# Altium PCB Altium_T3100_gamepad_2025-01-19.pcbdoc
Units mil, origin at the board's own origin, x right, y up, seen from the top; angles counter-clockwise.
Board outline 5750 x 3866.75 mil, 2 copper layers (Top Layer, Bottom Layer); 108 components, 76 nets, 400 pads, 126 vias.
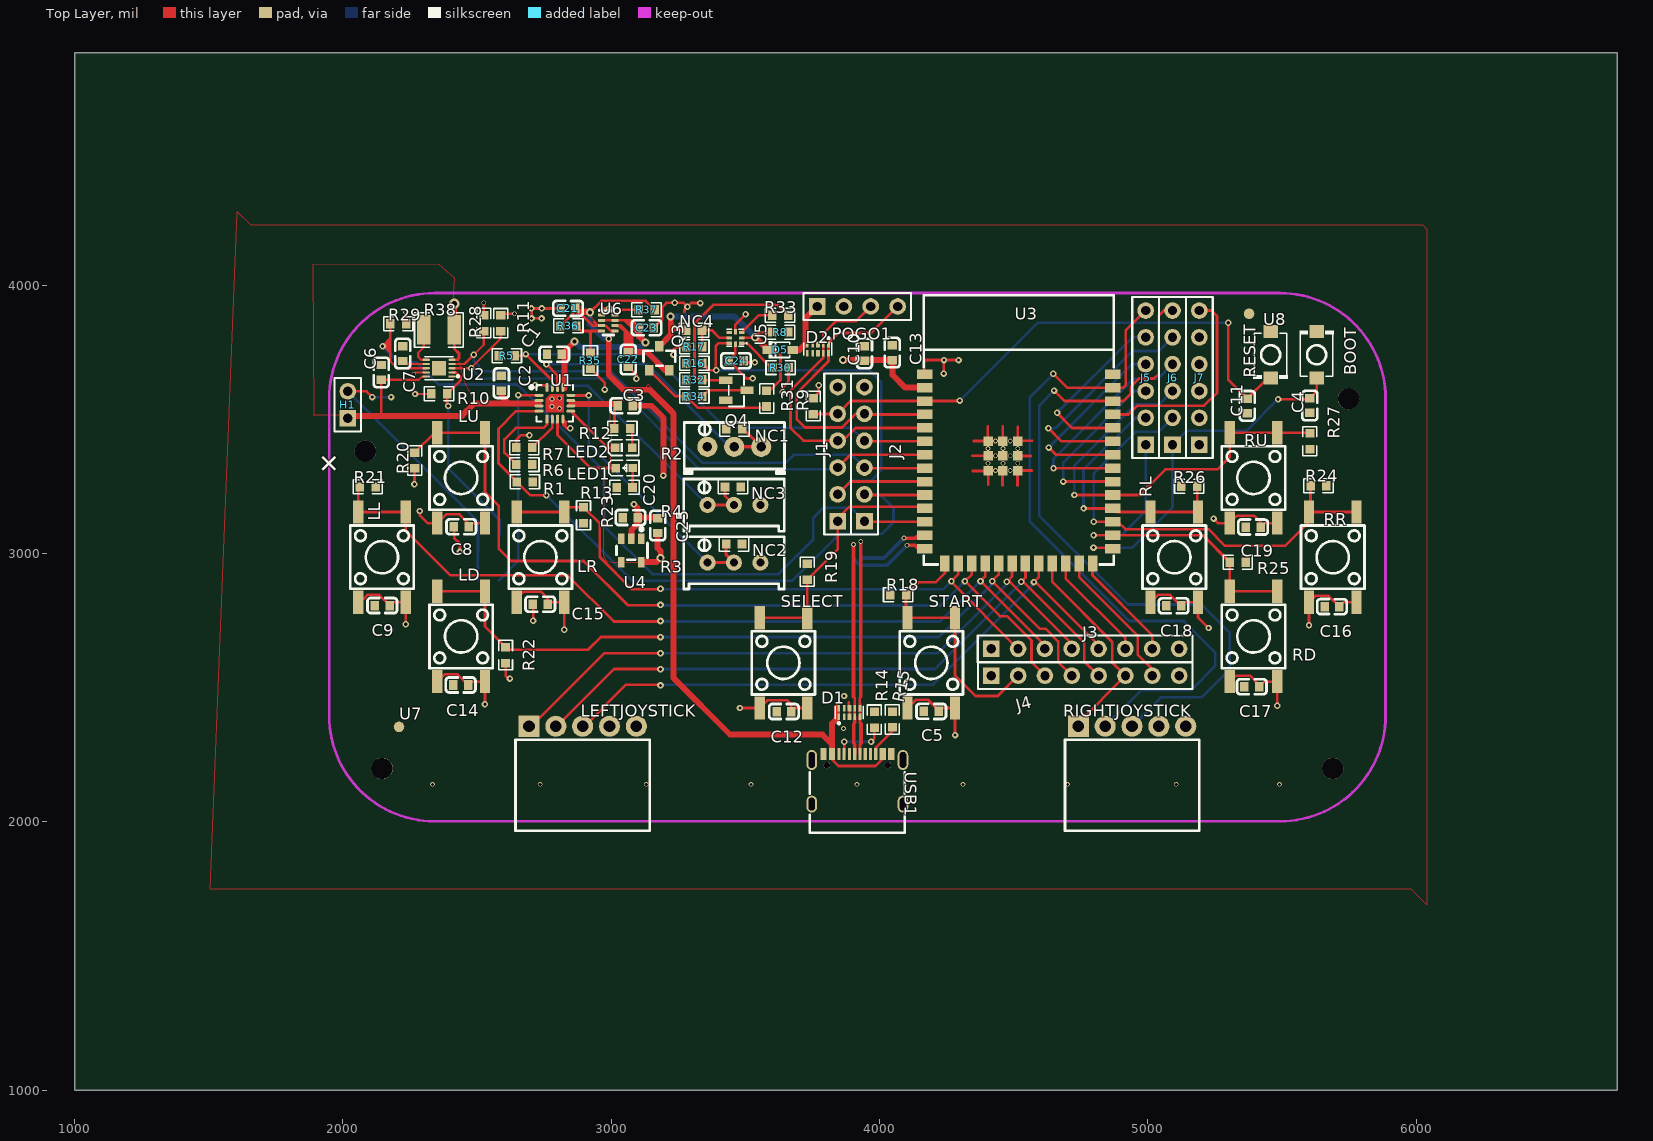
[diagram p0: Top Layer view]
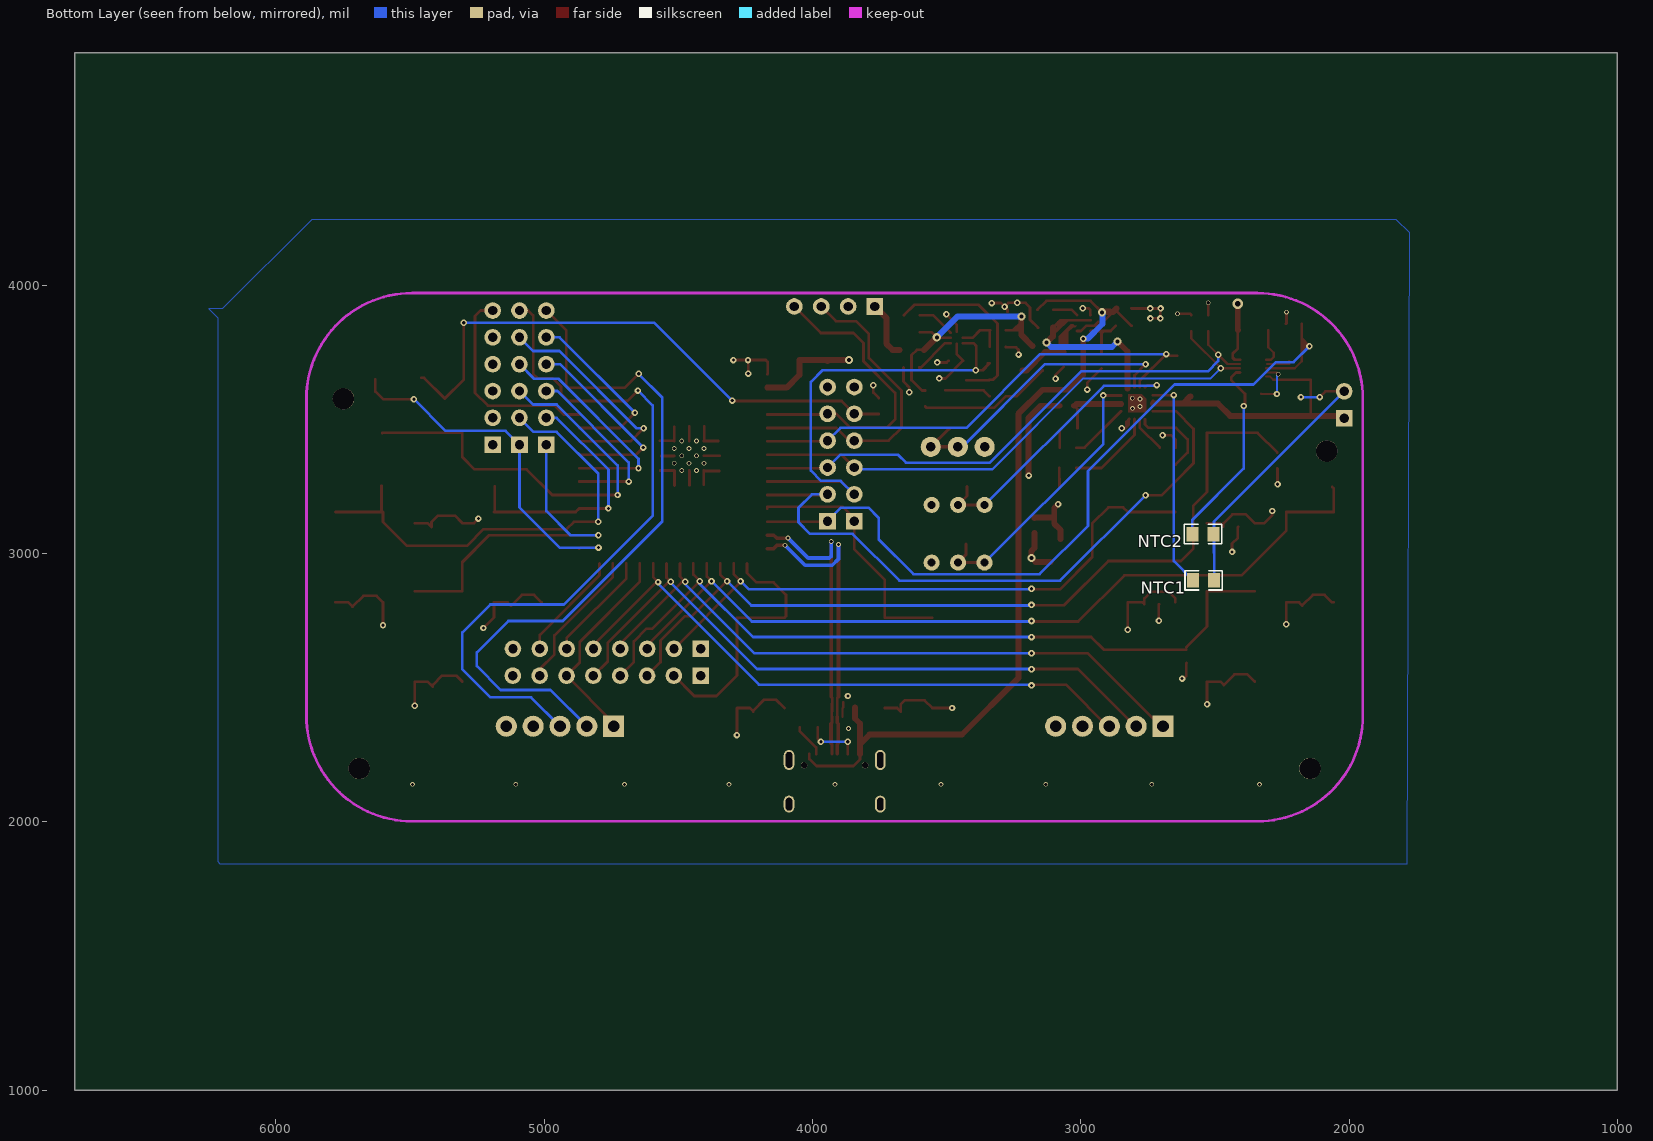
[diagram p1: Bottom Layer view, seen from below]

## Layer stack, top to bottom
Top Layer: signal copper (thickness not stored)
Dielectric: dielectric 12.6, FR-4, Dk 4.8
Bottom Layer: signal copper (thickness not stored)

## Board outline
6750,1000 1000,1000 1000,4866.75 6750,4866.75

## Components (designator, comment, footprint, x,y, rotation, side; value= is the part's Value field where it differs from the comment)
BOOT "TS-1088-AR02016" SW-SMD_L3.9-W3.0-P4.45 5628.75,3740.25 r90 top
C1 "1uF" C0603 2788.25,3742.25 r0 top
C2 "22pF" C0603 2590.75,3634.25 r270 top
C3 "22pF" C0603 3052.5,3550.25 r0 top
C4 "100nF" C0603 5603.75,3551.25 r90 top
C5 "100nF" C0603 4192.75,2411.25 r0 top
C6 "100nF" C0603 2143.25,3674.75 r90 top
C7 "470nF" C0603 2223,3744.75 r270 top
C8 "100nF" C0603 2441.25,3099.25 r0 top
C9 "100nF" C0603 2147.25,2805.75 r0 top
C10 "100nF" C0603 3943.75,3745.25 r270 top
C11 "1uF" C0603 5370.25,3549.75 r270 top
C12 "100nF" C0603 3643.75,2410.75 r0 top
C13 "22pF" C0603 4047,3748 r270 top
C14 "100nF" C0603 2439.25,2509.75 r0 top
C15 "100nF" C0603 2735.75,2810.75 r0 top
C16 "100nF" C0603 5686.25,2801.75 r0 top
C17 "100nF" C0603 5387.25,2503.25 r0 top
C18 "100nF" C0603 5096.25,2804.75 r0 top
C19 "100nF" C0603 5392.25,3098.25 r0 top
C20 "1uF" C0603 3071.25,3133.75 r180 top
C21 "1uF" C0603 2838.75,3913.25 r180 top
C22 "1uF" C0603 3063.75,3722.75 r90 top
C23 "100nF" C0603 3131.75,3841.25 r180 top
C24 "100nF" C0603 3465.75,3718.25 r0 top
C25 "1uF" C0603 3173.25,3103.75 r270 top
D1 "TPD4E05U06DQAR_C138714" USON-10_L2.5-W1.0-P0.50-BL 3887.72,2407.46 r0 top
D2 "TPD4E05U06DQAR_C138714" USON-10_L2.5-W1.0-P0.50-BL 3770.25,3762.25 r180 top
D5 "BAT760-7" SOD-323_L1.8-W1.3-LS2.5-RD 3629.75,3758.75 r0 top
H1 "HDR-F-2.54_1x2" HDR-F-2.54_1X2 2018.75,3554 r90 top
J1 "HDR-M-2.54_1x6" HDR-M-2.54_1X6 3843.75,3370.25 r90 top
J2 "HDR-M-2.54_1x6" HDR-M-2.54_1X6 3943.75,3370.25 r90 top
J3 "HDR-M-2.54_1x8" HDR-M-2.54_1X8 4816,2644.5 r0 top
J4 "HDR-M-2.54_1x8" HDR-M-2.54_1X8 4816.5,2544.51 r0 top
J5 "HDR-M-2.54_1x6" HDR-M-2.54_1X6 4991.75,3655.29 r90 top
J6 "HDR-M-2.54_1x6" HDR-M-2.54_1X6 5091.74,3655.29 r90 top
J7 "HDR-M-2.54_1x6" HDR-M-2.54_1X6 5191.74,3655.29 r90 top
LD "K2-1102SP-C4SC-04" KEY-SMD_4P-L6.0-W6.0-P4.50-LS9.5-BL 2440.88,2690.72 r0 top
LED1 "RED" LED0603-RD_RED 3048.75,3318.25 r0 top
LED2 "GREEN" LED0603-RD_GREEN 3047.25,3394.25 r0 top
LEFTJOYSTICK "2.54mm 1*5TW bend Female header RHOS Bagged" HDR-TH_5P-P2.54-H-W8.5 2893.63,2356.08 r0 top
LL "K2-1102SP-C4SC-04" KEY-SMD_4P-L6.0-W6.0-P4.50-LS9.5-BL 2145.6,2986 r0 top
LR "K2-1102SP-C4SC-04" KEY-SMD_4P-L6.0-W6.0-P4.50-LS9.5-BL 2736.15,2986 r0 top
LU "K2-1102SP-C4SC-04" KEY-SMD_4P-L6.0-W6.0-P4.50-LS9.5-BL 2440.88,3281.28 r0 top
NC1 "0Ω" R0603 3459.25,3463.25 r0 top
NC2 "0Ω" R0603 3457.75,3034.75 r180 top
NC3 "0Ω" R0603 3453.75,3248.25 r180 top
NC4 "0Ω" R0603 3308.75,3831.75 r180 top
NTC1 "10K" R0805 2542.25,2899.75 r0 bottom
NTC2 "10K" R0805 2544.5,3072.25 r0 bottom
POGO1 "HDR-M-2.54_1x4" HDR-M-2.54_1X4 3917.25,3920.25 r0 top
Q3 "AO3401A" SOT-23_L2.9-W1.3-P1.90-LS2.4-BR 3179.75,3727.25 r270 top
Q4 "PMV45EN2R" SOT-23-3_L2.9-W1.3-P1.90-LS2.4-BR 3466.25,3607.75 r180 top
R1 "10kΩ" R0603 2678.25,3266.75 r180 top
R2 "100kΩ" RES-ADJ-TH_3P-L9.5-W4.9-P2.50-L_3296W 3458.75,3397.25 r0 top
R3 "10kΩ" RES-ADJ-TH_3P-L10.0-W10.0-P2.50-L 3457.25,2965.75 r0 top
R4 "10kΩ" RES-ADJ-TH_3P-L10.0-W10.0-P2.50-L 3457.25,3180.75 r0 top
R5 "10kΩ" R0603 2611.25,3736.75 r0 top
R6 "10kΩ" R0603 2676.25,3331.25 r180 top
R7 "10kΩ" R0603 2675.75,3394.25 r0 top
R8 "10kΩ" R0603 3629.75,3824.75 r180 top
R9 "10kΩ" R0603 3752.75,3549.25 r90 top
R10 "10kΩ" R0603 2358.5,3595 r180 top
R11 "4.7kΩ" R0603 2588.25,3858.25 r90 top
R12 "56Ω" R0603 3041.75,3466.25 r180 top
R13 "56Ω" R0603 3049.75,3246.25 r180 top
R14 "5.1kΩ" R0603 3980.75,2380.75 r270 top
R15 "5.1kΩ" R0603 4047.75,2381.25 r270 top
R16 "10kΩ" R0603 3309.75,3708.75 r0 top
R17 "10kΩ" R0603 3309.75,3770.25 r0 top
R18 "10kΩ" R0603 4069.25,2845.75 r0 top
R19 "10kΩ" R0603 3730.75,2931.75 r270 top
R20 "10kΩ" R0603 2267.75,3346.25 r90 top
R21 "10kΩ" R0603 2092.75,3248.25 r180 top
R22 "10kΩ" R0603 2606.25,2621.25 r90 top
R23 "10kΩ" R0603 2896.75,3142.25 r90 top
R24 "10kΩ" R0603 5635.75,3252.25 r180 top
R25 "10kΩ" R0603 5334.75,2967.25 r180 top
R26 "10kΩ" R0603 5153.75,3250.25 r0 top
R27 "10kΩ" R0603 5603.75,3418.25 r90 top
R28 "4.7kΩ" R0603 2525,3858.5 r90 top
R29 "4.7kΩ" R0603 2206.25,3855.75 r0 top
R30 "10kΩ" R0603 3631.25,3692.75 r0 top
R31 "10kΩ" R0603 3579.25,3577.25 r90 top
R32 "10kΩ" R0603 3309.75,3647.25 r0 top
R33 "75Ω" R0603 3629.25,3887.75 r0 top
R34 "75Ω" R0603 3309.75,3585.25 r180 top
R35 "10kΩ" R0603 2922.75,3718.75 r270 top
R36 "36kΩ" R0603 2840.25,3848.25 r0 top
R37 "10kΩ" R0603 3131.75,3908.25 r180 top
R38 "10mΩ" R1210 2358,3833 r180 top
RD "K2-1102SP-C4SC-04" KEY-SMD_4P-L6.0-W6.0-P4.50-LS9.5-BL 5393.62,2690.72 r0 top
RESET "TS-1088-AR02016" SW-SMD_L3.9-W3.0-P4.45 5457.25,3740.25 r270 top
RIGHTJOYSTICK "2.54mm 1*5TW bend Female header RHOS Bagged" HDR-TH_5P-P2.54-H-W8.5 4940.87,2356.08 r0 top
RL "K2-1102SP-C4SC-04" KEY-SMD_4P-L6.0-W6.0-P4.50-LS9.5-BL 5098.35,2986 r0 top
RR "K2-1102SP-C4SC-04" KEY-SMD_4P-L6.0-W6.0-P4.50-LS9.5-BL 5688.9,2986 r0 top
RU "K2-1102SP-C4SC-04" KEY-SMD_4P-L6.0-W6.0-P4.50-LS9.5-BL 5393.62,3281.28 r0 top
SELECT "K2-1102SP-C4SC-04" KEY-SMD_4P-L6.0-W6.0-P4.50-LS9.5-BL 3641.66,2592.3 r0 top
START "K2-1102SP-C4SC-04" KEY-SMD_4P-L6.0-W6.0-P4.50-LS9.5-BL 4192.84,2592.3 r0 top
U1 "BQ24075RGTR" QFN-16_L3.0-W3.0-P0.50-TL-EP1.7 2790.25,3559.75 r0 top
U2 "MAX17055ETB+" TDFN-10_L2.5-W2.0-P0.40-BL-EP 2358.5,3690.25 r90 top
U3 "ESP32-S3-WROOM-1-N4" WIFIM-SMD_ESP32-S3-WROOM-1-N8 4518.75,3315.25 r0 top
U4 "TPAP2112K-3.3TRG1" SOT-23-5_L2.9-W1.6-P0.95-LS2.8-BR 3075,3011.25 r90 top
U5 "NC7SZ74L8X" UFQFN-8_L1.6-W1.6-P0.50-TL 3462.75,3803.25 r180 top
U6 "TPS2116DRLR" SOT-583-8_L2.1-W1.6-P0.50-LS1.6-BL 2989.25,3858.75 r270 top
U7 "FIDUCIAL 1MM" "FIDUCIAL 1MM" 2209.25,2353.5 r0 top
U8 "FIDUCIAL 1MM" "FIDUCIAL 1MM" 5377,3893.25 r0 top
USB1 "GT-USB-7010C" USB-C-SMD_GT-USB-7010C 3917.25,2159.23 r0 top

## Footprints (in the part's own frame and the unit in brackets; to place one, negate y for a bottom-side part, rotate by r counter-clockwise, add the part's x,y. Pads: shape width x height; smd on the part's side, far side on the other; paste and mask are expansions set on the pad)
C0603 [mm]
  rect 0.8x0.9 smd paste+0 mask+0.051: 1(-0.7,0) 2(0.7,0)
  silkscreen extent -1.41,-0.71 1.39,0.72
"FIDUCIAL 1MM" [mm]
  round 1 smd paste+0 mask+0.5: 1(0,0)
HDR-F-2.54_1X2 [mil]
  rect 62x62 hole 35 paste+0 mask+2: 1(-50,0)
  round 62 hole 35 paste+0 mask+2: 2(50,0)
  silkscreen extent -100,-49 100,50
HDR-M-2.54_1X4 [mil]
  rect 62x62 hole 35 paste+0 mask+2: 1(-150,0)
  round 62 hole 35 paste+0 mask+2: 2(-50,0) 3(50,0) 4(150,0)
  silkscreen extent -200,-50 200,50
HDR-M-2.54_1X6 [mil]
  rect 62x62 hole 35 paste+0 mask+2: 1(-250,0)
  round 62 hole 35 paste+0 mask+2: 2(-150,0) 3(-50,0) 4(50,0) 5(150,0) 6(250,0)
  silkscreen extent -300,-50 300,50
HDR-M-2.54_1X8 [mil]
  rect 62x62 hole 35 paste+0 mask+2: 1(-400,0)
  round 62 hole 35 paste+0 mask+2: 2(-300,0) 3(-200,0) 4(-100,0) 5(0,0) 6(100,0) 7(200,0) 8(300,0)
  silkscreen extent -450,-50 350,50
HDR-TH_5P-P2.54-H-W8.5 [mm]
  rect 2x2 hole 1.1 paste+0 mask+0.051: 1(-5.08,0)
  round 2 hole 1.1 paste+0 mask+0.051: 2(-2.54,0) 3(0,0) 4(2.54,0) 5(5.08,0)
  silkscreen extent -6.35,-9.91 6.35,-1.27
KEY-SMD_4P-L6.0-W6.0-P4.50-LS9.5-BL [mm]
  rect 0.98x2.2 smd paste+0 mask+0.051: 1(-2.25,-4.275) 2(-2.25,4.275) 3(2.25,-4.275) 4(2.25,4.275)
  silkscreen extent -3,-3 3,3
LED0603-RD_GREEN [mm]
  rect 0.8x0.8 smd paste+0 mask+0.051: 1(-0.799,-0.003) 2(0.799,0.004)
  silkscreen extent -1.49,-0.75 1.39,0.76
LED0603-RD_RED [mm]
  rect 0.8x0.8 smd paste+0 mask+0.051: 1(-0.799,-0.003) 2(0.799,0.004)
  silkscreen extent -1.49,-0.75 1.39,0.76
QFN-16_L3.0-W3.0-P0.50-TL-EP1.7 [mm]
  oval 0.85x0.28 smd paste-100 mask+0.05: 1(-1.5,0.75) 2(-1.5,0.25) 3(-1.5,-0.25) 4(-1.5,-0.75) 9(1.5,-0.75) 10(1.5,-0.25) 11(1.5,0.25) 12(1.5,0.75)
  oval 0.28x0.85 smd paste-100 mask+0.05: 5(-0.75,-1.5) 6(-0.25,-1.5) 7(0.25,-1.5) 8(0.75,-1.5) 13(0.75,1.5) 14(0.25,1.5) 15(-0.25,1.5) 16(-0.75,1.5)
  Top Layer region: 0.85,0.85 0.85,-0.85 -0.85,-0.85 -0.85,0.425 -0.425,0.85
  silkscreen extent -2.38,-1.72 1.72,1.73
R0603 [mil]
  rect 31.75x34.02 smd paste-3937.01 mask+2: 1(-29.66,0) 2(29.66,0)
  silkscreen extent -55,-26 55,26
R0805 [mil]
  rect 44.59x54.21 smd paste-3937.01 mask+2: 1(39.37,0) 2(-39.37,0)
  silkscreen extent -69,-36 69,36
R1210 [mil]
  rect 50.49x110.55 smd paste-3937.01 mask+2: 1(-56.74,0) 2(56.74,0)
  silkscreen extent -91,-64 91,64
RES-ADJ-TH_3P-L9.5-W4.9-P2.50-L_3296W [mm]
  round 1.9 hole 0.9 paste+0 mask+0.051: 1(-2.55,0) 2(-0.01,0) 3(2.55,0)
  silkscreen extent -4.75,-2.54 4.75,2.3
RES-ADJ-TH_3P-L10.0-W10.0-P2.50-L [mil]
  round 60 hole 30 paste+0 mask+2: 1(-98.43,0) 2(0,0) 3(98.43,0)
  silkscreen extent -187,-98 187,96
SOD-323_L1.8-W1.3-LS2.5-RD [mm]
  rect 1x0.75 smd paste+0 mask+0.051: 1(-1.173,0) 2(1.173,0)
  silkscreen extent -1.08,-0.8 0.9,0.8
SOT-23-3_L2.9-W1.3-P1.90-LS2.4-BR [mm]
  rect 1.25x0.7 smd paste+0 mask+0.051: 1(1,-0.95) 2(1,0.95) 3(-1,0)
  silkscreen extent -0.73,-1.53 0.73,1.53
SOT-23-5_L2.9-W1.6-P0.95-LS2.8-BR [mm]
  rect 1x0.6 smd paste+0 mask+0.05: 1(1.1,-0.95) 2(1.1,0) 3(1.1,0.95) 4(-1.1,0.95) 5(-1.1,-0.95)
  silkscreen extent -0.89,-1.52 2.16,1.4
SOT-23_L2.9-W1.3-P1.90-LS2.4-BR [mm]
  rect 1x0.8 smd paste+0 mask+0.051: 1(1.15,-0.95) 2(1.15,0.95) 3(-1.15,0)
  silkscreen extent -0.7,-1.5 0.7,1.5
SOT-583-8_L2.1-W1.6-P0.50-LS1.6-BL [mm]
  rect 0.28x0.68 smd paste+0 mask+0.051: 1(-0.75,-0.64) 2(-0.25,-0.64) 3(0.25,-0.64) 4(0.75,-0.64) 5(0.75,0.64) 6(0.25,0.64) 7(-0.25,0.64) 8(-0.75,0.64)
  silkscreen extent -1.27,-0.92 1.14,0.51
SW-SMD_L3.9-W3.0-P4.45 [mm]
  rect 1.23x1.36 smd paste+0 mask+0.051: 1(-2.185,0) 2(2.185,0)
  silkscreen extent -2.03,-1.62 2.25,1.62
TDFN-10_L2.5-W2.0-P0.40-BL-EP [mm]
  oval 0.2x0.685 smd paste+0 mask+0.051: 1(-0.8,-1.218) 2(-0.4,-1.218) 3(0,-1.218) 4(0.4,-1.218) 5(0.8,-1.218) 6(0.8,1.217) 7(0.4,1.217) 8(0,1.217) 9(-0.4,1.217) 10(-0.8,1.217)
  rect 1.4x1.3 smd paste-0.05 mask+0.051: 11(0,0)
  silkscreen extent -1.08,-1.88 1.08,1.33
UFQFN-8_L1.6-W1.6-P0.50-TL [mm]
  rect 0.53x0.3 smd paste+0 mask+0.051: 1(-0.585,0.5) 2(-0.585,0) 3(-0.585,-0.5) 5(0.585,-0.5) 6(0.585,0) 7(0.585,0.5)
  rect 0.3x0.53 smd paste+0 mask+0.051: 4(0,-0.585) 8(0,0.585)
  silkscreen extent -1.14,-0.8 0.8,0.8
USB-C-SMD_GT-USB-7010C [mm]
  oval 1x1.9 hole 0.6 slot 1.5 at 90 deg paste+0 mask+0.05: 1(-4.32,1.807) 2(4.32,1.807)
  oval 1x1.6 hole 0.6 slot 1.2 at 90 deg paste+0 mask+0.05: 3(4.32,-2.373) 4(-4.32,-2.373)
  rect 0.6x1.15 smd paste-100 mask+0.05: A1B12(-3.2,2.372) A4B9(-2.4,2.372) B1A12(3.2,2.373) B4A9(2.4,2.372)
  rect 0.3x1.15 smd paste-100 mask+0.05: A5(-1.25,2.372) A6(-0.25,2.372) A7(0.25,2.372) A8(1.25,2.372) B5(1.75,2.372) B6(0.75,2.372) B7(-0.75,2.372) B8(-1.75,2.372)
  round 0.6 hole 0.6 unplated paste+0: ""(-2.89,1.308) ""(2.89,1.308)
  silkscreen extent -4.5,-5.07 4.5,0.65
USON-10_L2.5-W1.0-P0.50-BL [mm]
  rect 0.25x0.609 smd paste+0 mask+0.051: 1(-1,-0.415) 2(-0.5,-0.415) 4(0.5,-0.415) 5(1,-0.415) 6(1,0.415) 7(0.5,0.415) 9(-0.5,0.415) 10(-1,0.415)
  rect 0.38x0.609 smd paste+0 mask+0.051: 3(0,-0.415) 8(0,0.414)
  silkscreen extent -1.33,-1.12 1.33,0.58
WIFIM-SMD_ESP32-S3-WROOM-1-N8 [mm]
  rect 1.5x0.9 smd paste+0 mask+0.05: 1(-8.9,8.955) 2(-8.9,7.685) 3(-8.9,6.415) 4(-8.9,5.145) 5(-8.9,3.875) 6(-8.9,2.605) 7(-8.9,1.335) 8(-8.9,0.065) 9(-8.9,-1.205) 10(-8.9,-2.475) 11(-8.9,-3.745) 12(-8.9,-5.015) 13(-8.9,-6.285) 14(-8.9,-7.555) 27(8.9,-7.555) 28(8.9,-6.285) 29(8.9,-5.015) 30(8.9,-3.745) 31(8.9,-2.475) 32(8.9,-1.205) 33(8.9,0.065) 34(8.9,1.335) 35(8.9,2.605) 36(8.9,3.875) 37(8.9,5.145) 38(8.9,6.415) 39(8.9,7.685) 40(8.9,8.955)
  rect 0.9x1.5 smd paste+0 mask+0.05: 15(-6.985,-8.955) 16(-5.715,-8.955) 17(-4.445,-8.955) 18(-3.175,-8.955) 19(-1.905,-8.955) 20(-0.635,-8.955) 21(0.635,-8.955) 22(1.905,-8.955) 23(3.175,-8.955) 24(4.445,-8.955) 25(5.715,-8.955) 26(6.985,-8.955)
  rect 0.9x0.9 smd paste+0 mask+0.051: 41(-2.9,-0.165) 41(-2.9,1.235) 41(-2.9,2.635) 41(-1.5,-0.165) 41(-1.5,1.235) 41(-1.5,2.635) 41(-0.1,-0.165) 41(-0.1,1.235) 41(-0.1,2.635)
  silkscreen extent -9,-9.05 9,16.45

## Free pads (board coordinates)
  round 80 hole 80 unplated paste+0: ""(2083.75,3381.25) ""(2145.6,2198.6) ""(5688.9,2198.6) ""(5747.96,3576.55)

## Via types
v1: diameter 24, hole 12, Top Layer to Bottom Layer, tented both sides, 65 vias
v2: diameter 17.72, hole 11.81, Top Layer to Bottom Layer, tented both sides, 34 vias
v3: diameter 24.41, hole 12.2, Top Layer to Bottom Layer, tented both sides, 19 vias
v4: diameter 30, hole 15, Top Layer to Bottom Layer, tented both sides, 7 vias
v5: diameter 40, hole 20, Top Layer to Bottom Layer, tented both sides, 1 vias

## Nets (pads, with @x,y where several pads share a name; then routed paths per layer and width w, separated by ;. In a path a pad name is that pad's centre, name@x,y a point inside that pad or via, vN(x,y) a via of type N, cw(c..) or ccw(c..) an arc to the next point about the centre after c; other vN are vias at no path point)
+3.3V: C5.2 C8.2 C9.2 C10.2 C12.2 C13.2 C15.2 C16.2 C17.2 C18.2 C19.2 C24.1 C25.2 J2.6 J4.1 J4.8 J7.1 J7.5 LEFTJOYSTICK.4 LL.1 LL.3 LR.1 LR.3 LU.1 LU.3 R9.2 R11.2 R28.2 R29.2 R30.2 RD.1 RD.3 RIGHTJOYSTICK.4 RL.1 RL.3 RR.1 RR.3 RU.1 RU.3 SELECT.1 SELECT.3 START.1 START.3 U3.2 U4.5 U5.8 | length 4125
  Top Layer w10: LL.1@2057.05,2817.65 2063.15,2817.65 2091.25,2845.75 2134.85,2845.75 C9.2 ; C9.2 2186.75,2817.69 LL.3 v1(2234.18,2736.25) ; v2(2233.25,3899.25) 2233.25,3858.41 R29.2 ; v1(2286.25,3158.25) 2286.25,3142.75 2316.05,3112.95 LU.1@2352.25,3112.95 ; 2352.25,2522.45 2379.15,2549.25 2427.35,2549.25 2466.85,2509.75 ; LU.1 2385.07,3145.75 2435.25,3145.75 2468.81,3112.19 C8.2 2482.53,3112.97 LU.3 ; 2466.81,2509.75 2479.48,2522.42 2529.46,2522.42 v1(2529.46,2438.25) ; R28.2 2525.25,3888.41 v2(2525.25,3934.25) ; R11.2 2593.59,3893.25 v2(2639.25,3893.25) ; LR.1@2647.55,2817.65 2647.55,2832.25 2672.95,2857.75 2738.25,2857.75 2763.35,2832.65 C15.2@2763.35,2810.75 ; C15.2 2770.25,2817.69 LR.3 v1(2824.73,2715.25) ; U5.8 3462.75,3742.81 C24.1 3504.19,3652.25 v1(3527.75,3652.25) ; v1(3479.75,2423.99) SELECT.1 ; SELECT.1@3553.05,2423.95 3581.85,2452.75 3656.25,2452.75 3671.35,2437.65 C12.2@3671.35,2410.75 ; v1(3639.5,3600.5) 3639.5,3619.25 3645.5,3625.25 3660.91,3640.66 R30.2 ; C12.2 3684.55,2423.99 SELECT.3 ; R9.2@3752.75,3578.91 3773.25,3599.41 v3(3773.25,3627.25) ; START.1@4104.25,2423.99 4135.01,2454.75 4180.25,2454.75 4220.31,2414.69 C5.2 4233.05,2423.99 START.3 v1(4281.42,2323.25) ; RL.1 5037.83,2845.75 5082.81,2845.75 C18.2 5136.75,2817.69 RL.3 5186.93,2761.32 v1(5226,2722.25) ; v1(5244.75,3129.75) 5261.53,3112.97 RU.1 5332.82,3140.75 5396.25,3140.75 5419.81,3117.19 C19.2 5434.53,3112.97 RU.3 ; RD.1 5327.37,2544.75 5379.75,2544.75 5414.81,2509.69 C17.2 5433.98,2522.42 RD.3 v1(5482.21,2432.25) ; v1(5600.32,2732.25) RR.1 5624.88,2842.25 5673.31,2842.25 C16.2 5729.75,2817.69 RR.3
  Top Layer w22: U4.5 3168.94,2967.94 v4(3184.5,2983.5) 3184.5,3008.75 3173.25,3020 C25.2 ; v4(3863.25,3720.75) 3940.69,3720.75 C10.2 3946.94,3720.88 C13.2@4048.75,3720.88 ; C13.2@4048.75,3720.85 4048.75,3665.25 4096.25,3617.75 U3.2
+5V: C1.2 C23.2 U1.13 U6.2 U6.7 | length 686.4
  Top Layer w10: U6.2@2964.05,3868.59 U6.7 ; U6.7 3076.85,3868.55 C23.2
  Top Layer w22: 2826.25,3614.75 2826.25,3752.69 v4(2863.31,3789.75) ; C23.2@3104.19,3841.25 3104.19,3809.06 v4(3127.5,3785.75)
  Bottom Layer w22: v4(2863.31,3789.75) 2883.81,3769.25 3111,3769.25 v4(3127.5,3785.75)
ALLOWPOGOCHARGING: J1.2 R16.2 U3.9 U5.7 | length 1722.6
  Top Layer w10: R16.2 3365.41,3682.75 v1(3391.25,3682.75) 3389.55,3682.75 3389.55,3773.45 3399.55,3783.55 U5.7@3439.75,3783.55 ; R16.2 R16.2@3346.05,3708.75 ; J1.2 3891.29,3267.79 U3.9
  Bottom Layer w10: v1(3391.25,3682.75) 3962.25,3682.75 4006.25,3638.75 4006.25,3308.75 3968.25,3270.75 3894.75,3270.75 J1.2
ALRT_U2: J2.1 R29.1 U2.8 U3.12 | length 3042.4
  Top Layer w7.87: R29.1 2176.55,3715.85 2202.25,3690.25 U2.8
  Top Layer w10: v1(2148.25,3772) 2176.59,3800.34 R29.1 ; J2.1 3946.21,3117.79 U3.12
  Bottom Layer w10: v1(2148.25,3772) 2207.25,3712.95 2273.25,3712.95 2356.95,3629.25 2650.75,3629.25 2973.25,3306.75 2973.25,3102.95 3153.25,2922.95 3623.25,2922.95 3753.25,3052.95 3753.25,3132.95 3790.75,3170.45 3893.55,3170.45 J2.1
BAT+: C2.2 C6.1 H1.1 U1.2 U1.3 U2.10 | length 1185.6
  Top Layer w7.87: C6.1 2282.65,3647.15 2294.25,3658.75 U2.10
  Top Layer w10: 2143.25,3512.75 C6.1 ; U1.3 U1.2
  Top Layer w22: H1.1 2027.55,3512.75 2443.25,3512.75 2489.35,3558.85 2704.95,3558.85 ; 2591.75,3585.38 2618.31,3558.82 2731.2,3558.82
BAT_SAFE+: C3.1 C20.2 R12.2 R13.2 U1.10 U1.11 U4.1 U4.3 | length 446.4
  Top Layer w10: U1.10 2849.65,3550.25 C3.1 ; R12.2@3012.1,3466.25 3012.1,3537.47 C3.1 C3.1 ; C3.1@3022.22,3549.91 3022.56,3550.25 C3.1
  Top Layer w22: 2849.35,3557.05 3015.85,3557.05 3022.65,3550.25 C3.1
BATGND: C6.2 C7.1 H1.2 NTC1.2 NTC2.2 R38.2 U2.6 U2.11 | length 1218
  Top Layer w7.87: R38.2@2301.25,3832.95 2301.25,3768.05 2281.05,3747.75 2281.05,3731.95 2291.25,3721.75 U2.6@2310.55,3721.75
  Top Layer w10: H1.2 2088.25,3604 v1(2109.75,3582.5)
  Bottom Layer w10: H1.2 2503.38,3119.37 NTC2.2@2503.38,3096.75 ; v1(2109.75,3582.5) v1(2179.75,3582.5) ; NTC1.2@2502.85,2899.75 NTC2.2@2503.35,3096.75
C14_2: C14.2
EN: C11.1 J1.5 R9.1 RESET.2 U3.3 | length 2118.9
  Top Layer w10: R9.1 3843.09,3519.59 J1.5 3891.29,3567.79 U3.3 ; U3.3 4299.25,3567.75 v1@4299.25,3569.55 ; v1(5299.25,3859.5) 5299.25,3648.31 C11.1 5447.17,3654.23 RESET.2
  Bottom Layer w10: v1(4299.25,3569.5) 4589.25,3859.5 v1(5299.25,3859.5)
EN1_U1: R7.2 U1.6 | length 137.5
  Top Layer w10: R7.2 2780.41,3469.26 U1.6
EN2_U1: R6.2 U1.5 | length 314.2
  Top Layer w10: R6.2 2601.75,3376.05 2601.75,3424.75 2645.25,3468.25 2748.25,3468.25 2760.75,3480.75 U1.5@2760.75,3500.65
GND: BOOT.2 C1.1 C2.1 C3.2 C4.1 C5.1 C8.1 C9.1 C10.1 C11.2 C12.1 C13.1 C14.1 C15.1 C16.1 C17.1 C18.1 C19.1 C20.1 C21.2 C22.1 C23.1 C24.2 C25.1 D1.3 D1.8 D2.3 D2.8 J1.6 J3.1 J3.8 J7.2 J7.3 J7.4 LEFTJOYSTICK.5 NC1.1 NC2.1 NC3.1 POGO1.2 Q4.2 R1.1 R2.1 R3.3 R4.3 R5.1 R6.1 R7.1 R8.1 R14.1 R15.1 R16.1 R17.1 R18.1 R19.1 R20.1 R21.1 R23.1 R24.1 R25.1 R26.1 R27.1 R32.1 R35.2 R38.1 RESET.1 RIGHTJOYSTICK.5 U1.8 U2.5 U3.1 U3.40 U3.41 U4.2 U5.4 U6.1 USB1.1 USB1.2 USB1.3 USB1.4 USB1.A1B12 USB1.B1A12 | length 3059.4
  Top Layer w7.87: 3885.36,2447.03 3885.36,2426.14 D1.8 D1.3
  Top Layer w10: v1(2266.75,3258.25) 2266.75,3315.59 R20.1 ; U2.5@2406.45,3721.75 2426.25,3721.75 2433.75,3729.25 2433.75,3745.05 2414.75,3764.05 R38.1@2414.75,3832.95 ; C8.1 2415,3097.94 2415,3057.5 2436.25,3036.25 v1(2436.25,3005.5) ; 2606.25,2591.59 2607.25,2590.59 2607.25,2542.5 2616,2533.75 v1(2622.5,2533.75) ; R7.1 2646.75,3423.75 2663.75,3440.75 v1(2695.25,3440.75) ; C15.1 2709,2809.94 v1(2709,2749.25) ; v1(2740.5,3876) v1(2703.5,3876) 2703.5,3912 v1(2702.5,3913) v1(2741.5,3913) 2810.94,3913 C21.2 ; 2830.5,3480.5 2830.5,3489.97 U1.8 2822.5,3497.97 2822.5,3478.5 2834.5,3466.5 v1(2847.5,3466.5) ; R35.2 2976.25,3635.59 v1(2976.25,3610.75) ; U6.1@2964.05,3888.28 2964.5,3888.73 2964.5,3907.5 2970.75,3913.75 v1(2993,3913.75) ; C22.1 3094,3664.94 v1(3094,3651) ; C23.1@3159.31,3841.25 3189,3870.94 3189,3916.75 3206.25,3934 v1(3236.75,3934) 3269.5,3934 v1(3284,3919.5) ; v1(3232,3741) 3232,3759 3241,3768 3277.84,3768 R17.1 ; 3273.25,3901 3273.25,3908.75 v1(3284,3919.5) ; v1(3332,3933) 3297.5,3933 v1(3284,3919.5) ; U5.4 3462.75,3852.75 v1(3501,3891) ; C24.2 3499.81,3711.75 v1(3534.75,3711.75) ; U3.1 4167,3669.15 4167,3713.75 4174,3720.75 v1(4240.25,3720.75) ; v1(4239.5,3670.25) 4239.5,3720 v1(4240.25,3720.75) ; v1(4294.75,3720.75) v1(4240.25,3720.75) ; 4345.75,3364 4404.47,3364 U3.41@4404.6,3363.87 ; 4347.75,3307.5 4403.34,3307.5 4404.6,3308.76 4405.25,3308.11 4405.25,3255.5 ; 4351.25,3419 4404.59,3419 4403.5,3420.09 4403.5,3473 ; 4458.25,3254.5 4458.25,3307.28 U3.41@4459.72,3308.75 ; 4459,3473.25 4459,3419.71 U3.41@4459.72,3418.99 ; 4514.25,3253.5 4514.25,3308.18 4514.83,3308.76 4515.07,3309 4567.25,3309 ; 4514.75,3472.5 4514.75,3419.07 4514.83,3418.99 4515.59,3419.75 4568.5,3419.75 ; U3.41@4514.83,3363.87 4515.7,3363 4563.25,3363
  Top Layer w22: R38.1 2415.25,3833.51 v5(2415.25,3930.75) ; U4.2 3075.05,3087.25 3098.85,3111.05 C20.1 ; C3.2 3150,3550.25 3195,3505.25 3195,3291 v1(3194,3290) ; v1(3084.75,3183.5) 3098.81,3169.44 C20.1 3170.81,3133.75 C25.1
  other v1: 3867.75,2468.75
  other v2: 2334.5,2139.54 2735.75,2139.54 3130.75,2139.54 3520.75,2139.54 3915.75,2139.54 4310.75,2139.54 4700.75,2139.54 5105.75,2139.54 5490.75,2139.54 3865.28,2347.42 4432.15,3308.75 4487.27,3308.75 4404.59,3336.31 4459.71,3336.31 4514.83,3336.31 4432.15,3363.87 4487.27,3363.87 4404.59,3391.43 4459.71,3391.43 4514.83,3391.43 4432.15,3418.99 4487.27,3418.99 2807.8,3540.72 2779.26,3547.26 2779.34,3575.41 2807.88,3578.12
GPIO0: BOOT.1 C4.2 J6.1 U3.27 | length 1328.6
  Top Layer w10: v3(4797.25,3021.75) 4865.18,3021.75 U3.27 ; v3(5485.25,3574.75) 5599.69,3574.75 C4.2 5628.75,3603.81 BOOT.1@5628.75,3649.23
  Bottom Layer w10: v3(4797.25,3021.75) 4942.25,3021.75 5091.75,3171.25 J6.1@5091.75,3405.25 ; J6.1 5143.2,3456.75 5367.25,3456.75 v3(5485.25,3574.75)
GPIO39: J5.3 U3.32 | length 672.7
  Top Layer w10: v1(4685,3267.79) U3.32
  Bottom Layer w10: v1(4685,3267.79) 4685.05,3339.55 4950.75,3605.25 J5.3@4991.75,3605.25
GPIO40: J6.4 U3.33 | length 845.4
  Top Layer w10: v1(4648.25,3317.79) U3.33
  Bottom Layer w10: v1(4648.25,3317.79) 4648.25,3352.75 4946.45,3650.95 5037.45,3650.95 J6.4@5091.75,3705.25
GPIO41: J5.4 U3.34 | length 739.7
  Top Layer w10: v1(4630.5,3394.5) 4657.21,3367.79 U3.34
  Bottom Layer w10: v1(4630.5,3394.5) 4941.25,3705.25 J5.4@4991.75,3705.25
GPIO42: J6.5 U3.35 | length 862.9
  Top Layer w10: v1(4629.25,3466.5) 4677.96,3417.79 U3.35
  Bottom Layer w10: v1(4629.25,3466.5) 4655.5,3466.5 4943.25,3754.25 5040.65,3754.25 J6.5@5091.75,3805.25
GPIO45: J3.7 U3.26 | length 410.3
  Top Layer w10: U3.26 4793.75,2918.75 5016,2696.5 J3.7
GPIO47: J3.6 U3.24 | length 410.3
  Top Layer w10: U3.24@4693.75,2962.75 4693.75,2906.45 4916.05,2684.25 J3.6@4916.05,2644.55
GPIO48: J4.7 U3.25 | length 531.2
  Top Layer w10: U3.25@4743.75,2962.75 4743.75,2912.45 4962.05,2694.25 4962.05,2622.95 5016.45,2568.45 J4.7@5016.45,2544.55
JOYSTICKLEFTBTN: J3.4 LEFTJOYSTICK.1 U3.20 | length 2437
  Top Layer w10: LEFTJOYSTICK.1@2693.75,2347.25 2974.92,2628.42 v3@3183.87,2628.42 ; U3.20 4493.75,2913.75 v3(4474.25,2894.25) 4486.25,2894.25 4716.05,2664.55 J3.4@4716.05,2644.55
  Bottom Layer w10: v3@3183.87,2628.42 4217.37,2628.42 v3@4474.37,2885.42
  other v3: 3183.75,2628.25
JOYSTICKLEFTX: J3.5 LEFTJOYSTICK.3 U3.22 | length 2333.4
  Top Layer w10: LEFTJOYSTICK.3@2894.75,2350.25 3055.42,2510.92 v3@3178.37,2510.92 ; U3.22@4593.75,2962.75 4593.75,2911.75 v3(4575.25,2893.25) 4581.45,2893.25 4816.05,2658.75 J3.5@4816.05,2644.55
  Bottom Layer w10: v3@3178.37,2510.92 4199.87,2510.92 v3@4576.37,2887.42
  other v3: 3183.75,2508.25
JOYSTICKLEFTY: J4.5 LEFTJOYSTICK.2 U3.21 | length 2506.1
  Top Layer w10: LEFTJOYSTICK.2@2793.69,2352.91 3010.36,2569.59 v3@3183.81,2569.59 ; U3.21 4543.75,2909.75 v3(4528.25,2894.25) 4536,2894.25 4762.75,2667.5 4762.75,2598.26 J4.5
  Bottom Layer w10: v3@3183.81,2569.59 4206.81,2569.59 v3@4528.31,2891.08
  other v3: 3183.75,2568.25
JOYSTICKRIGHTBTN: J4.6 RIGHTJOYSTICK.1 U3.23 | length 792.3
  Top Layer w10: U3.23@4643.75,2962.75 4643.75,2894.25 4867.25,2670.75 4867.25,2593.75 J4.6@4916.45,2544.55 ; RIGHTJOYSTICK.1 4740.87,2368.88 J4.6
JOYSTICKRIGHTX: J6.6 RIGHTJOYSTICK.3 U3.38 | length 2707.3
  Top Layer w10: v1(4650.5,3606.75) 4689.46,3567.79 U3.38 ; U3.38@4869.15,3567.75 4909.25,3567.75 4937.25,3595.75 4937.25,3622.05 4967.25,3652.05 5023.55,3652.05 5041.05,3669.55 5041.05,3886.75 5059.55,3905.25 J6.6@5091.75,3905.25
  Bottom Layer w10: v1(4650.5,3606.75) 4595.25,3551.5 4595.25,3140.25 4926,2809.5 5200.25,2809.5 5304.5,2705.25 5304.5,2568 5200.25,2463.75 5048.54,2463.75 RIGHTJOYSTICK.3
JOYSTICKRIGHTY: J5.6 RIGHTJOYSTICK.2 U3.39 | length 2637.9
  Top Layer w10: v1(4647.5,3669.5) 4699.21,3617.79 U3.39 ; U3.39@4869.15,3617.75 4908.55,3617.55 4917.25,3626.25 4917.25,3830.75 J5.6@4991.75,3905.25
  Bottom Layer w10: v1(4647.5,3669.5) 4559.75,3581.75 4559.75,3119 4930.5,2748.25 5133.25,2748.25 5250.5,2631 5250.5,2579.75 5162,2491.25 4976.04,2491.25 RIGHTJOYSTICK.2
LD_1: LD.1
LD_3: LD.3
LD_4: LD.4
LDBTN: J4.4 LD.2 U3.19 | length 2895.7
  Top Layer w10: LD.2 2529.46,2859.03 2529.46,2727.7 2606.25,2650.91 ; 2606.5,2641.1 2914.2,2641.1 2961.5,2688.4 v3@3184,2688.4 ; U3.19 4443.75,2920.75 v3(4419.75,2896.75) 4596.75,2719.75 4617.75,2719.75 4665.75,2671.75 4665.75,2595.25 J4.4@4716.45,2544.55
  Bottom Layer w10: v3@3184,2688.4 4221.5,2688.4 v3@4420,2886.9
  other v3: 3183.75,2688.25
LED1_2: LED1.2 R13.1 | length 72.1
  Top Layer w10: R13.1 LED1.2
LED2_2: LED2.2 R12.1 | length 74.9
  Top Layer w10: R12.1@3071.41,3466.25 3078.73,3458.93 LED2.2
LLBTN: J3.3 LL.2 LL.4 R21.2 U3.18 | length 3112.2
  Top Layer w10: R21.2 2057.02,3242.18 LL.2 LL.4 ; LL.4@2234.15,3154.35 2234.15,3085.45 2401.35,2918.25 2837.75,2918.25 3009.75,2746.25 v3@3183.75,2746.25 ; U3.18 4393.75,2914.25 v3(4376.25,2896.75) 4616,2657 J3.3
  Bottom Layer w10: v3@3183.75,2746.25 4225.75,2746.25 v3(4376.25,2896.75)
  other v3: 3183.75,2748.25
LRBTN: J3.2 LR.2 LR.4 R23.2 U3.16 | length 2271.9
  Top Layer w10: LR.2 LR.4 2842.32,3171.91 R23.2 ; R23.2@2896.75,3171.95 2957.75,3110.95 2957.75,2985.75 3077.25,2866.25 v3@3186.25,2866.25 ; U3.16 4293.75,2922.75 v3(4267.75,2896.75) 4267.75,2892.75 J3.2
  Bottom Layer w10: v3@3186.25,2866.25 4237.25,2866.25 v3@4267.75,2896.75
  other v3: 3183.75,2868.25
LUBTN: J4.3 LU.2 LU.4 R20.2 U3.17 | length 3174.8
  Top Layer w10: R20.2 2341.43,3449.58 LU.2 LU.4 ; LU.4@2529.45,3449.55 2529.45,3229.55 2580.75,3178.25 2580.75,3018.25 2627.25,2971.75 2897.25,2971.75 3061.75,2807.25 v3@3187.75,2807.25 ; U3.17 4343.75,2922.25 v3(4318.25,2896.75) 4448.75,2766.25 4475.05,2766.25 4566.05,2675.25 4566.05,2595.05 J4.3@4616.45,2544.55
  Bottom Layer w10: v3@3187.75,2806.25 4227.75,2806.25 v3(4318.25,2896.75)
  other v3: 3183.75,2808.25
POGO1_1: D2.5 D5.2 POGO1.1 | length 214.4
  Top Layer w22: D5.2@3675.95,3758.75 3701.75,3758.75 3724.75,3781.75 3724.75,3877.75 POGO1.1
POGO5V: D5.1 NC4.2 Q3.3 R8.2 R31.2 U5.2 | length 1069.4
  Top Layer w10: v4(3221.75,3882.25) 3221.75,3862.75 3252.75,3831.75 3279.05,3831.75 3221.75,3831.45 3234.45,3844.15 3240.35,3844.15 ; U5.2 3534.41,3803.25 v4(3536.75,3805.59) 3555.91,3824.75 R8.2 ; R31.2 3591.91,3606.91 3630.75,3645.75 3630.75,3739.25 3611.24,3758.75 D5.1
  Top Layer w22: Q3.3 3221.75,3814.53 v4(3221.75,3882.25) ; 3221.75,3847.87 3231.87,3837.75 3234.75,3838.25 ; v4@3536.75,3807.25 v4(3536.75,3805.59) D5.1
  Bottom Layer w22: v4(3221.75,3882.25) 3460.09,3882.25 v4(3536.75,3805.59)
POGO_RX: D2.1 D2.10 J2.5 POGO1.4 U3.4 | length 1158.6
  Top Layer w10: D2.10 D2.1 ; D2.10@3809.65,3745.95 3809.65,3716.15 3691.75,3598.25 3691.75,3499.75 3722.25,3469.25 3860.25,3469.25 3911.25,3520.25 J2.5 3946.21,3517.79 U3.4 ; D2.1 3809.65,3784.15 3847.25,3821.75 3968.75,3821.75 POGO1.4
POGO_TX: D2.2 D2.9 J1.4 POGO1.3 U3.5 | length 1159.5
  Top Layer w10: POGO1.3 3912.75,3865.75 3837.75,3865.75 3789.95,3817.95 3789.95,3778.55 D2.9 3789.95,3728.15 3668.25,3606.45 3668.25,3468.25 3716.25,3420.25 J1.4 3863.75,3420.25 3911.25,3467.75 U3.5
Q3_1: Q3.1 R31.1 R34.2 | length 496.2
  Top Layer w10: Q3.1@3142.35,3681.98 3239.08,3585.25 R34.2 3322.09,3543.25 3574.91,3543.25 R31.1
Q4_1: Q4.1 R32.2 R33.2 | length 709.8
  Top Layer w10: Q4.1 3341.51,3645.15 R32.2 3327.25,3647.25 3310.75,3663.75 3310.75,3856.25 3381.25,3926.75 3619.91,3926.75 R33.2
Q4_3: Q4.3 R34.1 | length 175.5
  Top Layer w10: R34.1 3361.91,3607.75 Q4.3
R22_1: R22.1
R22_2: R22.2
R33_1: R33.1 U5.3 | length 140.7
  Top Layer w10: U5.3 3550.6,3887.75 R33.1
RDBTN: J5.1 R25.2 RD.2 RD.4 U3.28 | length 1313.4
  Top Layer w10: v1(4797.5,3067.79) U3.28 ; U3.28@4869.15,3067.75 5204.55,3067.75 5305.05,2967.25 RD.2 RD.4
  Bottom Layer w10: v1@4797.55,3067.75 4901.55,3067.75 4991.75,3157.95 J5.1@4991.75,3405.25
RLBTN: J5.2 R26.2 RL.2 RL.4 U3.30 | length 985.5
  Top Layer w10: v1(4760.25,3167.79) U3.30 4882.62,3154.31 RL.2 RL.4 5183.41,3157.83 R26.2
  Bottom Layer w10: v1(4760.25,3167.79) 4760.25,3312.05 4953.55,3505.25 J5.2@4991.75,3505.25
RRBTN: J6.2 R24.2 RR.2 RR.4 U3.29 | length 1749.3
  Top Layer w10: v1(4798.25,3117.79) U3.29 ; U3.29@4869.15,3117.75 4888.75,3117.75 4916.25,3090.25 5225.25,3090.25 5286.25,3029.25 5512.25,3029.25 5600.35,3117.35 RR.2@5600.35,3154.35 ; R24.2 5606.09,3160.08 RR.2 RR.4
  Bottom Layer w10: v1(4798.25,3117.79) 4798.25,3298 4953.25,3453 5039.45,3453 J6.2
RUBTN: J6.3 R27.2 RU.2 RU.4 U3.31 | length 1618.1
  Top Layer w10: v1(4726,3217.79) U3.31 ; U3.31@4869.15,3217.75 4969.75,3217.75 5065.25,3313.25 5259.25,3313.25 5305.05,3359.05 RU.2 ; RU.2 RU.4 5602.08,3449.58 R27.2
  Bottom Layer w10: v1(4726,3217.79) 4726.05,3327.75 4953.25,3555.05 5041.45,3555.05 J6.3@5091.75,3605.25
RXD0: J5.5 U3.36 | length 677.7
  Top Layer w10: v1(4661.5,3524.25) 4717.96,3467.79 U3.36
  Bottom Layer w10: v1@4661.45,3524.25 4942.55,3805.25 J5.5@4991.75,3805.25
SAFEPOGO5V: C22.2 Q3.2 U6.6 | length 181.8
  Top Layer w22: C22.2@3063.75,3750.35 3133.45,3750.35 3201.75,3681.95 Q3.2
SCL_U2: J1.3 R11.1 U2.3 U3.7 | length 2127.6
  Top Layer w7.87: U2.3 2477.25,3690.25 2588.25,3801.25 R11.1
  Top Layer w10: J1.3 3891.29,3367.79 U3.7
  Bottom Layer w7.87: v1@2478.75,3690.75 v1(2478.75,3689.75) 2516.25,3652.25 2990.75,3652.25 3329.25,3313.75 3843.75,3313.75 J1.3
SDA_U2: J2.3 R28.1 U2.4 U3.8 | length 3682.5
  Top Layer w7.87: U2.4 2453.5,3706 2525,3777.5 R28.1
  Top Layer w10: J2.3 3946.21,3317.79 U3.8
  Bottom Layer w10: v1(2488,3740.75) 2488,3716.75 2526.25,3678.5 ; 2526.25,3678.5 2999.25,3677.75 ; 2526.25,3678.5 2999.25,3677.75 ; 2999.25,3677.75 3338.75,3338.25 ; 2999.25,3677.75 3338.75,3338.25 ; 3338.75,3338.25 3651.25,3338.25 ; 3338.75,3338.25 3651.25,3338.25 ; 3651.25,3338.25 3680.25,3367.25 ; 3651.25,3338.25 3680.25,3367.25 ; 3680.25,3367.25 3896.75,3367.25 ; 3680.25,3367.25 3896.75,3367.25 ; 3896.75,3367.25 J2.3 3896.75,3367.25
SELECTBTN: J1.1 R19.2 SELECT.2 SELECT.4 U3.11 | length 942.6
  Top Layer w10: SELECT.2 SELECT.4 ; SELECT.4 R19.2@3730.75,2902.05 ; R19.2 3843.75,3015.09 J1.1 3843.75,3129.75 3888.25,3174.25 4168.35,3174.25 U3.11
STANDBY_U1: J2.2 R1.2 U1.4 U3.10 | length 2458.7
  Top Layer w10: R1.2 2579.75,3336.05 2579.75,3464.25 2645.75,3530.25 U1.4 ; R1.2@2648.6,3266.75 2698.59,3216.75 v1(2758.75,3216.75) ; J2.2 3946.21,3217.79 U3.10
  Bottom Layer w10: v1(2758.75,3216.75) 3076.75,2898.75 3676.25,2898.75 3850.75,3073.25 4008.75,3073.25 4051.75,3116.25 4051.75,3170.25 4001.75,3220.25 J2.2
STARTBTN: J4.2 R18.2 START.2 START.4 U3.15 | length 992.2
  Top Layer w10: U3.15 4243.75,2927.75 4208.25,2892.25 4145.41,2892.25 R18.2 4098.91,2765.95 4104.25,2760.61 START.4 4281.42,2544.83 4357.75,2468.5 4440.49,2468.5 J4.2
SYSOFF_U1: J2.4 R5.2 U1.15 U3.6 | length 1835.7
  Top Layer w10: R5.2 2675.25,3736.75 v1(2681.25,3742.75) 2780.41,3643.59 U1.15 ; J2.4 3946.21,3417.79 U3.6
  Bottom Layer w10: v1@2685.25,3738.25 2685.25,3738.75 v1(2681.25,3742.75) 3151.75,3742.75 3426.25,3468.25 3895.75,3468.25 J2.4
TXD0: J7.6 U3.37 | length 781.8
  Top Layer w10: U3.37 4928.04,3517.79 4961,3550.75 5209.75,3550.75 5257.25,3598.25 5257.25,3884.5 5236.46,3905.29 J7.6
U1_1: NTC1.1 U1.1 | length 798.2
  Top Layer w10: v1(2653.25,3590.25) U1.1@2731.25,3589.25
  Bottom Layer w10: NTC1.1 2653.25,2971.38 v1(2653.25,3590.25)
U1_7: LED1.1 U1.7 | length 327.5
  Top Layer w10: U1.7 2800.09,3441.41 2923.38,3318.12 LED1.1
U1_9: LED2.1 U1.9 | length 222.8
  Top Layer w10: U1.9 2985.41,3394.12 LED2.1
U1_12: NC2.2 R3.1 R3.2 U1.12 | length 1053
  Top Layer w10: U1.12 2849.84,3588.75 v1(2916.25,3588.75)
  Top Layer w12: R3.1 3457.26,2965.75 3428.09,2994.91 NC2.2
  Bottom Layer w10: v1(2916.25,3588.75) 2916.25,3408.33 R3.1
U1_14: NC1.2 R2.2 R2.3 U1.14 | length 1129.1
  Top Layer w10: v1(2758.75,3705.25) 2800.09,3663.91 U1.14
  Top Layer w12: R2.2 3559.15,3397.25 3493.15,3463.25 NC1.2
  Bottom Layer w10: v1(2758.75,3705.25) 3133.75,3705.25 3441.75,3397.25 R2.2
U1_16: NC3.2 R4.1 R4.2 U1.16 | length 1053
  Top Layer w10: v1(2717.25,3627.25) 2752.27,3627.25 U1.16
  Top Layer w12: R4.1 3457.26,3180.75 3424.09,3213.92 NC3.2
  Bottom Layer w10: v1(2717.25,3627.25) 2719.75,3624.75 2914.25,3624.75 R4.1
U2_2: NTC2.1 R10.1 U2.2 | length 1273.9
  Top Layer w10: v1(2393,3549.5) 2388.16,3554.34 R10.1 2439.5,3646.34 2439.5,3656.25 2421.25,3674.5 U2.2
  Bottom Layer w10: v1@2393,3538.25 2393,3315.75 ; v1(2393,3549.5) 2393,3315.75 ; 2393,3315.75 2585,3123.75 ; 2393,3315.75 2585,3123.75 ; NTC2.1@2585,3073.38 NTC2.1 NTC2.1@2585,3073.38 ; NTC2.1@2585,3073.38 2585,3123.75 ; NTC2.1@2585,3073.38 2585,3123.75
U2_7: C7.2 U2.7 | length 93.2
  Top Layer w7.87: C7.2 2223.05,3705.95 U2.7@2305.05,3705.95
U2_9: R10.2 U2.9 | length 184.4
  Top Layer w7.87: v2(2264.25,3668) 2270.75,3674.5 U2.9 ; v1(2269.25,3594.25) R10.2
  Bottom Layer w7.87: v2(2264.25,3668) 2269.25,3663 v1(2269.25,3594.25)
U5_1: R30.1 U5.1 | length 153.4
  Top Layer w10: U5.1 3505.45,3783.55 3596.25,3692.75 R30.1
U5_6: NC4.1 R17.2 U5.6 | length 175
  Top Layer w10: R17.2 3339.41,3830.75 NC4.1 3375.25,3831.75 3403.75,3803.25 U5.6
U6_4: R35.1 R36.2 U6.4 | length 182.9
  Top Layer w10: R36.2 2888.94,3829.22 U6.4@2964.05,3829.22 ; R35.1 2922.75,3829.25
U6_8: R37.2 U6.8 | length 95.9
  Top Layer w10: U6.8 3034.42,3908.25 R37.2
USB1_A5: R14.2 USB1.A5 | length 205.2
  Top Layer w10: USB1.A5 v3(3868.04,2298.75) ; v3(3968.43,2297.85) 3980.75,2310.17 R14.2
  Bottom Layer w10: v3(3868.04,2298.75) 3868.94,2297.85 v3(3968.43,2297.85)
USB1_B5: R15.2 USB1.B5 | length 124.5
  Top Layer w10: USB1.B5 3986.15,2277.15 4047.75,2338.75 R15.2
USBC_D+: D1.4 D1.7 U3.14 USB1.A6 | length 1137
  Top Layer w9.84: 3907.01,2462.38 D1.7 D1.4
  Top Layer w11.81: USB1.A6 3907.41,2288.95 ; 3907.41,2369.15 D1.4
  Top Layer w13.94: v2@3902.65,3033.25 3902.68,2465.53 ; 3903.79,2292.58 3903.79,2365.53 ; v2@4102.17,3030.05 4133.32,3030.05 4145.58,3017.79 U3.14
  Bottom Layer w13.94: v2@3904.27,3032.58 v2(3902.82,3033.18) 3902.64,3001.86 3902.64,2979.17 3926.11,2955.7 4027.28,2955.7 v2(4101.9,3030.32)
USBC_D-: D1.5 D1.6 U3.13 USB1.A7 | length 1112.4
  Top Layer w9.84: 3926.7,2461.99 D1.6 ; D1.6@3927.06,2424.19 D1.5@3927.46,2391.29
  Top Layer w11.81: USB1.A7 3927.09,2288.91 ; 3927.09,2369.15 D1.5
  Top Layer w13.94: v2@3929.68,3044.25 3929.75,3044.34 3929.75,2489.25 3929.85,2465.92 ; 3930.75,2292.57 3930.75,2365.55 ; v2@4090.75,3057.05 4133.25,3057.05 4143.95,3067.75 U3.13
  Bottom Layer w13.94: v2@3929.74,3044.34 3929.14,3042.89 3929.57,3041.86 3929.57,3001.86 3929.57,2990.32 3937.26,2982.63 4016.13,2982.63 v2(4090.75,3057.25)
  other v2: 3929.75,3044.34
USBC_VBUS: C21.1 D1.1 D1.10 R36.1 R37.1 U6.3 U6.5 USB1.A4B9 USB1.B4A9 | length 3387.5
  Top Layer w10: R36.1 2866.35,3903.95 C21.1@2866.35,3913.25 ; C21.1 2930.65,3848.91 2964.05,3848.91 2949.09,3848.91 2935.25,3862.75 ; v4(2921.25,3898.75) 2963.75,3941.25 3128.41,3941.25 R37.1 ; U6.3@2964.05,3848.95 2979.45,3848.95 2999.15,3829.25 U6.5 ; USB1.A4B9 3822.75,2232.65 3847.75,2207.75 3985.25,2207.75 4011.75,2234.25 USB1.B4A9@4011.75,2252.65
  Top Layer w22: C21.1 2880.81,3898.75 v4(2921.25,3898.75) 2918.25,3901.75 2891.25,3901.75 ; v1(2990.75,3800) 2990.75,3665.75 3046.45,3610.05 3142.95,3610.05 3232.75,3520.25 3232.75,2535.25 3442.75,2325.25 3786.75,2325.25 3822.75,2289.25 USB1.A4B9 3822.75,2366.15 3841.75,2385.15 3841.75,2425.25
  Bottom Layer w22: v4(2921.25,3898.75) 2919.25,3896.75 2919.25,3854.75 2974,3800 v1(2990.75,3800)
pads on no net: D1.2 D1.9 D2.4 D2.6 D2.7 U2.1 U4.4 U5.5 U7.1 U8.1 USB1. USB1.A8 USB1.B6 USB1.B7 USB1.B8
copper on no net: | length 0.1

## Polygon pours and split planes (outlines as drawn)
GND on Bottom Layer (solid): 1775,4194.25 1825,4244.25 5866.75,4244.25 6200,3911 6250,3911 6216.75,3877.75 6216.75,1852.75 6208.25,1844.25 1783.5,1844.25
+3.3V on Mid-Layer 2 (solid): 1597.75,4282.25 1672.75,4207.25 6022.75,4207.25 6231.25,3998.75 6231.25,1799 1547.75,1799
GND on Mid-Layer 1 (solid): 1533.5,4366.75 6250,4366.75 6208.5,4325.25 6208.5,1500 5966.75,1741.75 1500,1741.75
BAT_SAFE+ on Top Layer (solid): 2995.75,3572.25 2994.75,3571.25 2994.75,3451.25 2999.75,3446.25 2997.25,3330.25 2971.5,3305.75 2973,3232 2969.75,2991.25 2983.75,2971.75 3006.25,2967.25 3232.25,2967.25 3232.25,3536.25 3140.75,3627.75 3140.75,3628.75 3138.25,3631.25 3087.25,3570.25 3070.75,3573.5 3062.75,3566.5 3051,3569.75
USBC_VBUS on Top Layer (solid): 2951.25,3853.75 2881.75,3923.25 2881.75,3930.75 2877.75,3926.75 2877.75,3897.25 2926.75,3848.25 2931.25,3848.25
GND on Top Layer (solid): 1606.75,4274 1656.75,4224 6023.5,4224 6040,4207.5 6040,1690.75 5981.75,1749 1506.75,1749
BATGND on Top Layer (solid): 1892,3513.5 1894.5,3516 2444.5,3516 2487,3558.5 2492,3558.5 2494.5,3561 2454.5,3638.5 2403.25,3829.75 2417,4026 2357,4078.5 1887,4076

## Keep-outs
Keep-Out Layer:
  lines w10: 1948.75,2395.45 ccw(c2342.45,2395.45) 2342.45,2001.75 ; 1948.75,3576.55 cw(c2342.45,3576.55) 2342.45,3970.25 ; 5492.05,2001.75 ccw(c5492.05,2395.45) 5885.75,2395.45 ; 5492.05,3970.25 cw(c5492.05,3576.55) 5885.75,3576.55

## Other copper
Top Layer:
  region net BAT+: 2731.2,3549.91 2711.75,3569.36 2711.75,3569.59 2731.2,3569.59
  region net +5V: 3007.91,3868.59 3006.84,3869.66 3014.45,3868.59 3007.91,3868.59
  region net SAFEPOGO5V: 3046,3765.75 3046,3825.5 3028,3843.5 3019.86,3843.5 3014.45,3848.91 3022.91,3848.91 3028,3854 3028,3852.25 3081.5,3798.75 3081.5,3762.75 3081.75,3762.5
  region net SAFEPOGO5V: 3014.45,3848.91 3022.66,3848.91 3028,3854.25 3037.25,3854.25 3081.5,3810 3081.5,3796.75 3081.25,3796.5 3081.25,3796.75 3034,3844
  region net +5V: 3021.91,3868.59 3025.18,3865.32 3014.45,3868.59 3021.91,3868.59
  region net +5V: 3042.25,3868.75 3088.75,3824 3104.19,3823.5 3091.75,3835.94 3087.75,3864.5
  region net U6_4: 2937.47,3829.22 2922.75,3814.5 2906.75,3829.22 2937.47,3829.22
  region net ALRT_U2: 2148.25,3772 2148.25,3771.8 2176.55,3743.5 2176.55,3793.5

## Silkscreen, mask and mechanical layers (free items; w line width, h text height)
Top Overlay:
  text "+" at 1955.97,3392.53 h80 r225